# EAGLE board opaq_n3 (EAGLE 6.3)
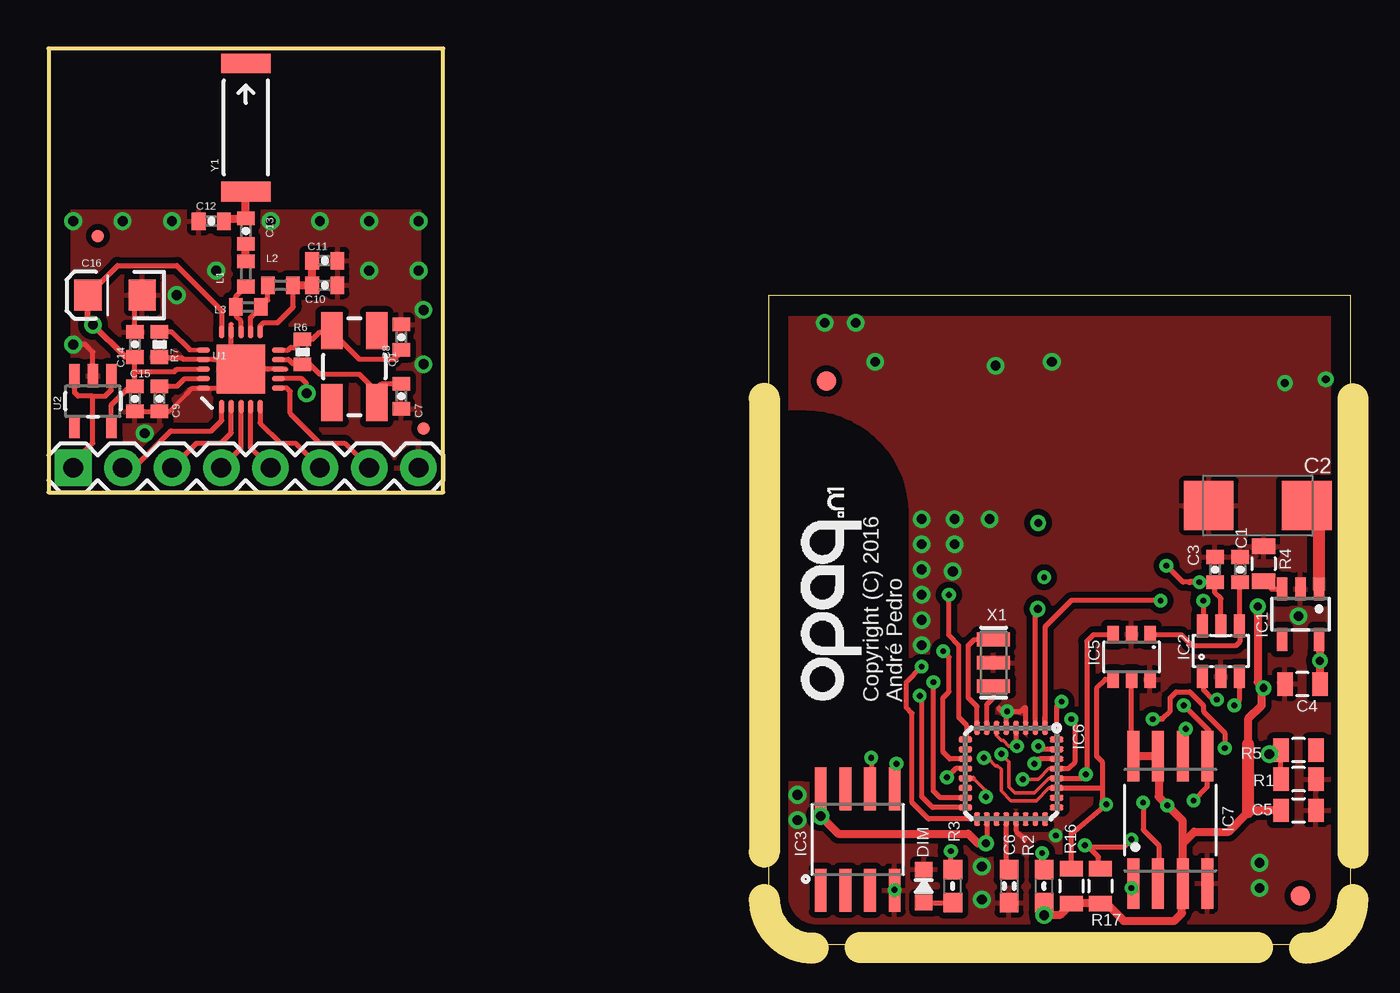
[diagram p0: board, top side]
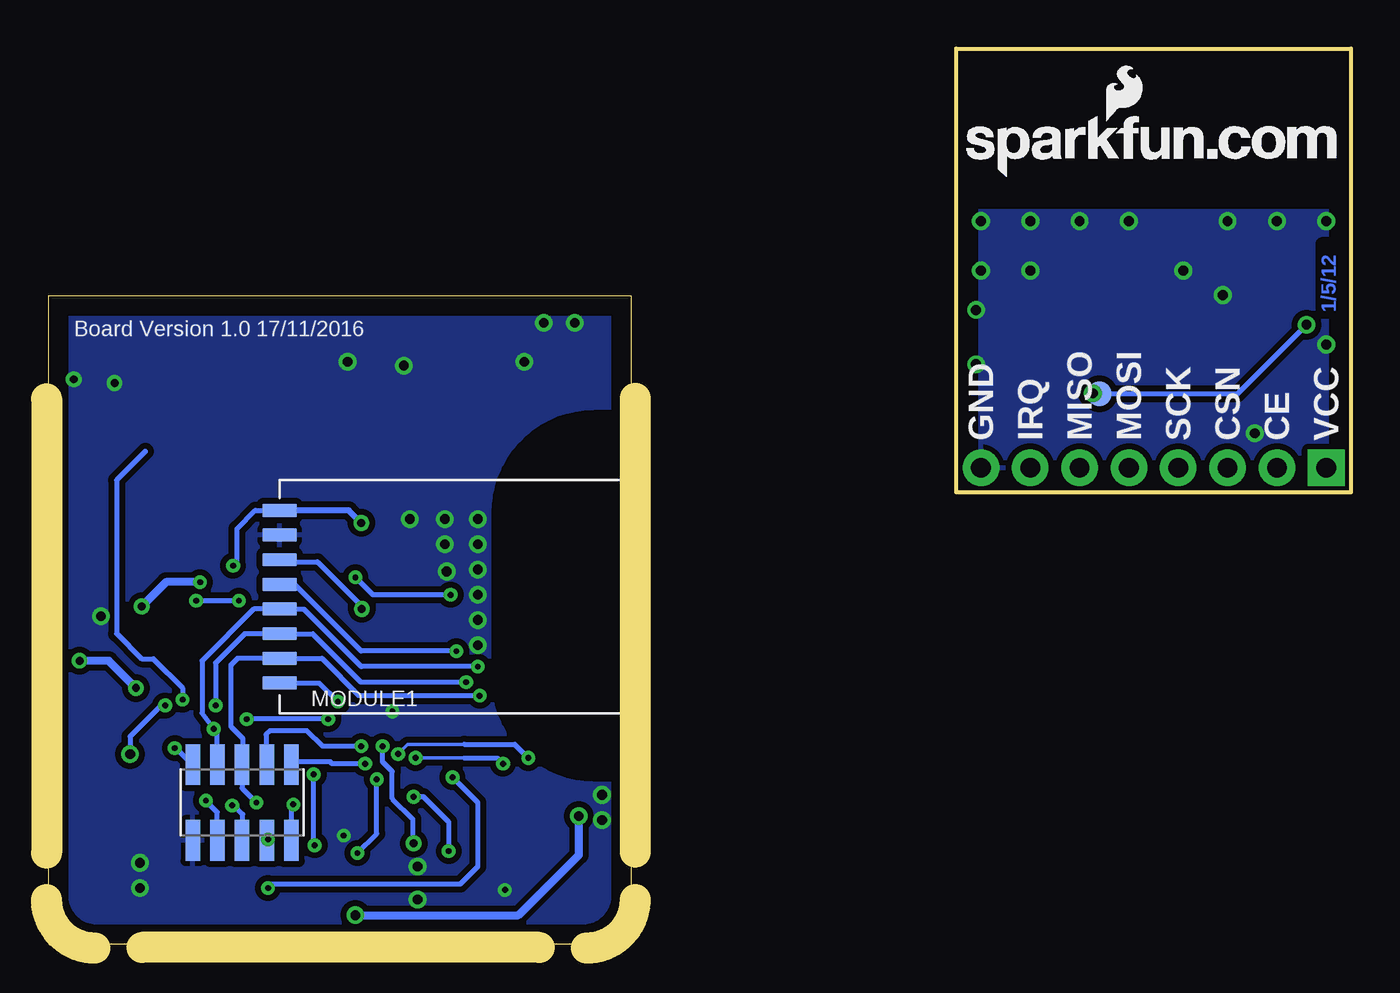
[diagram p1: board, bottom side, seen from below]

Size 67.06 x 46.13 mm. Coordinates in mm from the lower left corner, seen from the top.
Outline: 67.06,2.5 67.06,33.4 37.06,33.4 37.06,2.5 arc90 39.56,0 64.56,0 arc90 67.06,2.5
Outline: 0,23.27 20.32,23.27 20.32,46.13 0,46.13 0,23.27
Copper layers (1*16): Top 0.035mm / dielectric 1.5mm / Bottom 0.035mm
Design rules "default *": minimum track width 10mil, minimum drill 6mil, track to track 7mil, track to pad 7mil, pad to pad 7mil, via to via 7mil, smd to smd 7mil, copper to edge 40mil, drill to drill 8mil, minimum pad ring 10mil, minimum via ring 8mil, stop-mask expansion 4mil, vias tented up to drill 0.7mm, thermal gap 10mil
Net classes: 1 power: width 0.381 mm, clearance 0.254 mm; 2 gnd: width 0.305 mm, drill 0.406 mm, clearance 0.203 mm; 3 power usb: width 0.508 mm, drill 0.406 mm, clearance 0.203 mm
tRestrict: area 37.1,8.7 to 44,27.2
bRestrict: area 37.1,8.7 to 44,27.2
Milling: 8 lines

## Footprints (pad centres in the part's own frame; a part is rotated, then mirrored left to right if it is on the bottom)
0402-CAP = smd 0.7 x 0.9: 1 -0.65,0; 2 0.65,0
C/6032-28R = smd 2.55 x 2.5: + 2.525,0; - -2.525,0
0805 = smd 0.8 x 1.2: 1 -0.9,0; 2 0.9,0
0603-CAP = smd 1.016 x 0.965: 1 -0.85,0; 2 0.85,0
EIA3216 = smd 1.4 x 1.6: A 1.4,0; C -1.4,0
0603-LED = smd 0.8 x 0.9: MINUS -0.85,0; PLUS 0.85,0
SOT23-5 = smd 0.55 x 1.2: 1 -0.95,-1.3; 2 0,-1.3; 3 0.95,-1.3; 4 0.95,1.3; 5 -0.95,1.3
SOT23-6 = smd 0.55 x 1.2: 1 -0.95,-1.3; 2 0,-1.3; 3 0.95,-1.3; 4 0.95,1.3; 5 0,1.3; 6 -0.95,1.3
SOIC8 = smd 0.61 x 2.21: 1 -1.905,-2.616; 2 -0.635,-2.616; 3 0.635,-2.616; 4 1.905,-2.616; 5 1.905,2.616; 6 0.635,2.616; 7 -0.635,2.616; 8 -1.905,2.616
SOT23-6' = smd 0.6 x 0.9: 1 -0.95,-1.15; 2 0,-1.15; 3 0.95,-1.15; 4 0.95,1.15; 5 0,1.15; 6 -0.95,1.15
MLF32 = smd 0.7 x 0.3: 1 -2.35,1.75; 2 -2.35,1.25; 3 -2.35,0.75; 4 -2.35,0.25; 5 -2.35,-0.25; 6 -2.35,-0.75; 7 -2.35,-1.25; 8 -2.35,-1.75; 17 2.35,-1.75; 18 2.35,-1.25; 19 2.35,-0.75; 20 2.35,-0.25; 21 2.35,0.25; 22 2.35,0.75; 23 2.35,1.25; 24 2.35,1.75 | smd 0.3 x 0.7: 9 -1.75,-2.35; 10 -1.25,-2.35; 11 -0.75,-2.35; 12 -0.25,-2.35; 13 0.25,-2.35; 14 0.75,-2.35; 15 1.25,-2.35; 16 1.75,-2.35; 25 1.75,2.35; 26 1.25,2.35; 27 0.75,2.35; 28 0.25,2.35; 29 -0.25,2.35; 30 -0.75,2.35; 31 -1.25,2.35; 32 -1.75,2.35
SO08WIDE = smd 0.61 x 2.6: 1 -1.905,-3.269; 2 -0.635,-3.269; 3 0.635,-3.269; 4 1.905,-3.269; 5 1.905,3.286; 6 0.635,3.286; 7 -0.635,3.286; 8 -1.905,3.286
FIDUCIAL-1X2.5 = smd 1 x 1: 1 0,0
1X08 = drill 1.016 pad 1.88 square: 1 0,0 | drill 1.016 pad 1.88: 2 2.54,0; 3 5.08,0; 4 7.62,0; 5 10.16,0; 6 12.7,0; 7 15.24,0; 8 17.78,0
MICRO-FIDUCIAL = smd 0.635 x 0.635: 1 0,0
62101021021 = smd 0.75 x 2.1: 1 -1.905,-1.95; 2 -0.635,-1.95; 3 0.635,-1.95; 4 1.905,-1.95; 5 3.175,-1.95; 6 3.175,1.95; 7 1.905,1.95; 8 0.635,1.95; 9 -0.635,1.95; 10 -1.905,1.95
C0402 = smd 0.7 x 0.9: 1 -0.65,0; 2 0.65,0
SMD8-MODULE = smd 0.7 x 1.8: 1 -4.445,0; 2 -3.175,0; 3 -1.905,0; 4 -0.635,0; 5 0.635,0; 6 1.905,0; 7 3.175,0; 8 4.445,0
CRYSTAL-SMD-5X3 = smd 1.9 x 1.1: 1 -1.85,-1.15; 2 1.85,-1.15; 3 1.85,1.15; 4 -1.85,1.15
0603-RES = smd 1.016 x 0.965: 1 -0.85,0; 2 0.85,0
0402-RES = smd 0.7 x 0.9: 1 -0.65,0; 2 0.65,0
PAD.03X.05 = smd 1.27 x 1.27: P$1 0,0
QFN20_ALT1 = smd 2.515 x 2.515: 0 0,0 | smd 0.686 x 0.293: 1 -1.925,0.986; 2 -1.925,0.493; 3 -1.925,0; 4 -1.925,-0.493; 5 -1.925,-0.986; 11 1.925,-0.986; 12 1.925,-0.493; 13 1.925,0; 14 1.925,0.493; 15 1.925,0.986 | smd 0.293 x 0.686: 6 -0.986,-1.925; 7 -0.493,-1.925; 8 0,-1.925; 9 0.493,-1.925; 10 0.986,-1.925; 16 0.986,1.925; 17 0.493,1.925; 18 0,1.925; 19 -0.493,1.925; 20 -0.986,1.925
PAD-0.008 = smd 0.203 x 0.203: P$1 0,0
RESONATOR-SMD = smd 0.7 x 1.7: 1 -1.2,0; 2 0,0; 3 1.2,0
ANTENNA-CHIP5 = smd 1.016 x 2.54: FEED -3.302,0; NC 3.302,0

## Placement (x,y rotation side)
C1  100pf  [0402-CAP]  61.36,19.3 90 top
C2  [C/6032-28R]  62.26,22.6 0 top
C3  100pf  [0402-CAP]  60.06,19.3 90 top
C4  0.1uF  [0805]  64.56,13.4 180 top
C5  0.1uF  [0805]  64.36,6.9 0 top
C6  0.1  [0603-CAP]  49.46,3 270 top
C7  22pF  [0402-CAP]  18.16,28.22 270 top
C8  22pF  [0402-CAP]  18.16,31.27 90 top
C9  33nF  [0402-CAP]  5.72,28.1 270 top
C10  2.2nF  [0402-CAP]  14.22,33.94 0 top
C11  4.7pF  [0402-CAP]  14.22,35.21 0 top
C12  1.0pF  [0402-CAP]  8.38,37.24 0 top
C13  1.5pF  [0402-CAP]  10.16,36.73 90 top
C14  10nF  [0402-CAP]  4.45,30.89 270 top
C15  1nF  [0402-CAP]  4.45,28.1 90 top
C16  10uF  [EIA3216]  3.43,33.43 180 top
DIM  LED0603  [0603-LED]  45.06,3 270 top
FRAME1  FRAME-LETTER  [CREATIVE_COMMONS]  16.95,-13.72 0 top  (outside the outline)
FRAME2  FRAME-LETTERNO_PACKAGE  [DUMMY]  16.95,-13.72 0 top  (outside the outline)
IC1  RT9013-XXXB  [SOT23-5]  64.46,17 180 top
IC2  TS5A3157  [SOT23-6]  60.36,15.1 0 top
IC3  ATSHA204_SOIC8  [SOIC8]  41.66,5.4 0 top
IC5  ADS1100  [SOT23-6']  55.76,14.8 180 top
IC6  ATMega-328  [MLF32]  49.56,8.8 270 top
IC7  AT25F512BWIDE_5.3MM  [SO08WIDE]  57.76,6.4 0 top
JP1  FIDUCIAL1X2.5  [FIDUCIAL-1X2.5]  64.46,2.5 0 top
JP2  FIDUCIAL1X2.5  [FIDUCIAL-1X2.5]  40.06,29 0 top
JP3  [1X08]  1.27,24.54 0 top
JP4  FIDUCIALUFIDUCIAL  [MICRO-FIDUCIAL]  2.54,36.48 0 top
JP5  FIDUCIALUFIDUCIAL  [MICRO-FIDUCIAL]  19.3,26.57 0 top
K1  62101021021  [62101021021]  56.46,7.3 180 bottom
L1  3.9nH  [C0402]  10.16,34.52 90 top
L2  2.7nH  [C0402]  11.94,33.94 180 top
L3  8.2nH  [C0402]  10.29,32.82 180 top
MODULE1  NRF24L01-MOD-SMD  [SMD8-MODULE]  55.16,17.9 270 bottom
Q1  16MHz  [CRYSTAL-SMD-5X3]  15.75,29.75 90 top
R1  [0805]  64.36,8.5 180 top
R2  10k  [0603-RES]  51.26,3 90 top
R3  1k5  [0603-RES]  46.56,3 90 top
R4  [0805]  62.56,19.6 270 top
R5  [0805]  64.36,10 180 top
R6  1M  [0402-RES]  13.08,30.51 90 top
R7  22K  [0402-RES]  5.72,30.89 270 top
R16  100k  [0805]  52.66,3 270 top
R17  [0805]  54.16,3 270 top
TP1  [PAD.03X.05]  12.95,28.35 0 bottom
U1  NRF24L01ALT1  [QFN20_ALT1]  9.91,29.62 90 top
U2  3.3V  [SOT23-5]  2.29,27.97 180 top
U$1  PAD  [PAD-0.008]  9.4,31.93 0 top
U$4  PAD  [PAD-0.008]  12.22,29.62 0 top
U$5  LOGO-SFENEW  [SFE-NEW-WEBLOGO]  19.81,39.53 0 bottom
X1  16 MHz  [RESONATOR-SMD]  48.66,14.5 90 top
Y1  ANTENNA2SMD5  [ANTENNA-CHIP5]  10.16,42.07 90 top

## Library data of the parts
C1 C3-C5 R16 = SparkFun-Passives
C2 = rcl
C6 DIM IC6 IC7 R2 R3 = LowPowerLab
C7-C16 JP1-JP5 L1-L3 Q1 R6 R7 TP1 U2 U$5 X1 Y1 = SparkFun
FRAME1 = SparkFun-Aesthetics
FRAME2 = SparkFun-Aesthetics; DESIGNER: Nobody; VERSION: v01
IC1 = v-reg_extra
IC2 = pimoroni
IC3 = SparkFun-DigitalIC; PROD_ID: IC-11981
IC5 = bytewerk-analog; MF: TI; MPN: ADS1100; OC_MOUSER: 595-ADS1100A1IDBVT
K1 = Wurth_Elektronik_Electromechanic_Board_to_Board_Connectors_rev15c
MODULE1 = nrf24l01
R1 R4 R5 R17 = resistor
U1 U$1 U$4 = Testing

## Nets
3.3V: C3.1 C4.1 C5.1 IC1.5 IC2.5 IC3.8 IC5.5 IC6.4 IC6.6 IC6.18 IC7.3 IC7.7 IC7.8 K1.8 MODULE1.1 R2.1 R16.2 R17.2
A0: IC6.23
A1: IC6.24
A2: IC6.25
A3: IC6.26
A4_SDA: IC3.5 IC5.4 IC6.27 K1.10 R16.1
A5_SCL: IC3.6 IC5.3 IC6.28 K1.9 R17.1
A6: IC6.19
A7: IC6.22
ADC_IN: C1.1 IC2.4 IC5.1
ANT: C12.2 C13.2 Y1.FEED
AREF: C6.1 IC6.20
CE: JP3.2 U1.1
CSN: JP3.3 U1.2
CTRL_ADC: IC2.6 IC6.1
CURRENT_VOUT: IC2.1
D0_RX: IC6.30 K1.1
D1_TX: IC6.31 K1.2
D8: IC6.12 IC7.1
D11_MOSI: IC6.15 IC7.5 K1.7 MODULE1.6
D12_MISO: IC6.16 IC7.2 K1.3 MODULE1.7
D13_SCK: IC6.17 IC7.6 K1.4 MODULE1.5
DIM2: IC6.10
DIM3: IC6.13 R3.2
DIM4: IC6.14
GND: C1.2 C2.- C3.2 C4.2 C5.2 C6.2 DIM.MINUS IC1.2 IC2.2 IC3.4 IC5.2 IC5.6 IC6.3 IC6.5 IC6.21 IC7.4 K1.6 MODULE1.2 R1.1 R4.1 X1.2
GND1: C7.2 C8.2 C9.2 C10.2 C11.2 C12.1 C14.1 C15.1 C16.C JP3.8 R7.2 U1.0 U1.8 U1.14 U1.17 U1.20 U2.2 U$1.P$1 U$4.P$1
IQR: JP3.7 U1.6
MISO: JP3.6 U1.5
MOSI: JP3.5 U1.4
N$1: IC6.7 X1.1
N$2: DIM.PLUS R3.1
N$3: C7.1 Q1.1 R6.1 U1.9
N$4: C8.1 Q1.3 R6.2 U1.10
N$5: R7.1 U1.16
N$6: L1.1 L3.2 U1.13
N$7: C10.1 C11.1 L2.1 U1.11
N$8: C9.1 U1.19
N$9: L2.2 L3.1 U1.12
N$10: IC1.3 R4.2
N$11: C13.1 L1.2
N$21: IC6.8 X1.3
NRF24_CE: IC6.2 MODULE1.3
NRF24_CSN: IC6.11 MODULE1.4
NRF24_IRQ: IC6.32 MODULE1.8
RAW: JP3.1 U2.1 U2.3
RELAY_SET: IC6.9
RST: IC6.29 K1.5 R2.2
SCK: JP3.4 U1.3
V_MEASURE: IC2.3 R1.2 R5.2
VCC: C2.+ IC1.1
VCC1: C14.2 C15.2 C16.A TP1.P$1 U1.7 U1.15 U1.18 U2.5
VPLUS_IN [power]: R5.1

## Tracks (layer width: path | path; a pad name or v marks a point on that pad's centre or on a via)
3.3V  (via drill 0.3, 0.4, 0.5)
  Top 0.178: v49.86,10.2 49.46,10.2 49.16,10.5 49.06,10.5 48.81,10.75 IC6.6
  Top 0.254: IC6.18 48.31,5.25 v48.26,5.2 | IC6.4 49.81,10.35 v49.86,10.2 | 55.86,13.75 IC5.5 55.76,9.78 IC7.8 | IC3.8 v39.76,6.61 | R17.2 54.46,2.1 | 58.36,3.1 IC7.3 | v51.26,1.5 R2.1 | IC2.5 60.36,17.8 60.06,18.1 C3.1 v59.26,18.65 | 58.76,18.65 58.41,18.65 v57.56,19.5
  Top 0.305: v59.26,18.65 58.76,18.65
  Top 0.406: 61.76,10.3 61.76,11.6 62.46,12.3 62.46,13.1 v62.56,13.2 62.26,13.5 v62.26,17.4 | v39.76,6.61 40.66,5.7 47.36,5.7 47.86,5.2 v48.26,5.2 | IC7.8 IC7.7 57.16,9.65 57.16,7.6 v57.61,7.15 58.4,6.37 58.4,5.2 | R17.2 R16.2 52.06,1.5 v51.26,1.5 | 54.46,2.1 55.36,1.2 57.96,1.2 58.36,1.6 58.36,3.1 | IC7.3 58.4,5.2 | 58.4,5.2 59,5.8 60.76,5.8 61.76,6.8 61.76,6.9 C5.1 | IC1.5 65.46,15.65 v65.46,14.6 C4.1
  Top 0.61: 61.76,10.3 61.76,6.8
  Bottom 0.254: v49.86,10.2 49.86,9.4 49.36,8.9 49.36,7.5 IC6.18 48.31,5.25 v48.26,5.2 | v57.56,19.5 57.36,19.7 57.36,21.4 56.42,22.34 MODULE1.1 | K1.8 57.06,5.38 57.06,6.7 57.51,7.15 v57.61,7.15
  Bottom 0.305: v50.96,21.7 51.61,22.34 MODULE1.1
  Bottom 0.406: v51.26,1.5 42.86,1.5 39.76,4.61 v39.76,6.61 | v62.56,13.2 63.96,14.6 v65.46,14.6 | v59.26,18.65 61.01,18.65 v62.26,17.4
A4_SDA  (via drill 0.3)
  Top 0.178: IC6.27 51.51,8.05 50.86,7.4 49.56,7.4 49.06,7.9 49.06,9 48.86,9.2 48.76,9.2 48.36,9.6 v48.16,9.6
  Top 0.254: IC5.4 54.41,13.65 53.96,13.2 53.96,9.7 54.26,9.4 54.26,8 | IC6.27 54.21,8.05 54.26,8 | v43.66,9.3 43.66,8.11 IC3.5 | R16.1 52.66,5.7 v54.46,7.2 54.26,7.4 54.26,8
  Bottom 0.178: 45.66,9.6 v48.16,9.6
  Bottom 0.254: 45.66,9.6 43.96,9.6 v43.66,9.3 | K1.10 54.56,7.11 v54.46,7.2
A5_SCL  (via drill 0.3)
  Top 0.178: IC6.28 51.51,8.55 50.76,7.8 49.76,7.8 49.46,8.1 49.46,9.4 v49.06,9.8
  Top 0.254: IC5.3 53.81,15.95 53.46,15.6 53.46,8.8 v53.41,8.75 53.21,8.55 IC6.28 | v42.36,9.6 42.36,8.08 IC3.6 | R17.1 54.06,4 54.06,4.5 53.46,5.1 v53.36,5.1 53.46,5 55.36,5 v55.76,5.4
  Bottom 0.178: 45.66,10.3 48.56,10.3 v49.06,9.8
  Bottom 0.254: 45.66,10.3 43.06,10.3 v42.36,9.6 | v53.36,5.1 53.41,5.15 v53.41,8.75 | K1.9 v55.76,5.4
ADC_IN
  Top 0.254: IC5.1 58.31,15.95 58.86,15.4 61.16,15.4 61.36,15.6 61.36,16.35 IC2.4 61.31,18.6 C1.1
ANT
  Top 0.203: C12.2 9.14,37.24 9.28,37.38
  Top 0.406: 9.28,37.38 C13.2 10.16,37.49 Y1.FEED
AREF
  Top 0.254: C6.1 49.31,4 IC6.20
CE
  Top 0.254: U1.1 8.92,26.98 8.38,26.45 6.3,26.45 4.42,24.57 3.84,24.57 JP3.2
CSN
  Top 0.254: JP3.3 7.62,25.81 8.89,25.81 9.41,26.33 U1.2
CTRL_ADC  (via drill 0.3)
  Top 0.254: v59.46,17.7 59.46,16.45 IC2.6 | 51.31,11.75 IC6.1 51.31,16.35 52.66,17.7 v57.26,17.7
  Bottom 0.254: v59.46,17.7 v57.26,17.7
CURRENT_VOUT  (via drill 0.3)
  Top 0.254: IC2.1 59.46,13.75 59.46,13.1 59.96,12.6 v60.16,12.6
  Bottom 0.254: 62.06,25.4 63.56,23.9 63.56,16 62.26,14.7 61.66,14.7 60.16,13.2 v60.16,12.6
D0_RX  (via drill 0.3)
  Top 0.254: IC6.30 51.01,9.55 v50.76,9.3
  Bottom 0.254: v50.76,9.3 52.46,9.3 52.56,9.4 54.41,9.4 K1.1
D1_TX  (via drill 0.3)
  Top 0.254: IC6.31 51.11,10.05 v50.96,10.2
  Bottom 0.254: v50.96,10.2 52.96,10.2 53.76,11 55.66,11 55.86,10.8 55.86,9.29 K1.2
D8  (via drill 0.3)
  Top 0.254: IC6.12 46.71,9.05 v46.26,8.6 | v55.76,2.9 55.82,3.1 IC7.1
  Bottom 0.254: v46.26,8.6 44.96,7.3 44.96,4 45.86,3.1 55.56,3.1 v55.76,2.9
D11_MOSI  (via drill 0.3)
  Top 0.254: IC6.15 45.91,7.55 45.56,7.9 v45.56,13.5 | v58.96,7.4 59.66,8.1 IC7.5 | 59.56,9.79 IC7.5 | v58.46,12.3 59.76,11 59.76,9.78 IC7.5
  Bottom 0.254: v45.56,13.5 50.96,13.5 53.45,15.99 MODULE1.6 56.97,15.99 58.46,14.5 v58.46,12.3 | K1.7 58.37,6.8 v58.96,7.4
D12_MISO  (via drill 0.3)
  Top 0.254: IC6.16 45.51,7.05 44.96,7.6 44.96,12.7 v44.86,12.8 | v56.36,7.3 56.36,5.9 57.16,5.1 57.16,3.17 IC7.2
  Bottom 0.254: v44.86,12.8 51.06,12.8 52.98,14.72 MODULE1.7 57.34,14.72 57.66,14.4 57.66,11.2 57.06,10.6 57.06,9.29 K1.3 57.09,8.04 v56.36,7.3
D13_SCK  (via drill 0.3)
  Top 0.254: IC6.17 45.31,6.45 44.46,7.3 44.46,11.9 44.16,12.2 44.16,13.5 v44.96,14.3 | IC7.6 58.56,9.85 v58.56,11.1
  Bottom 0.254: v44.96,14.3 50.96,14.3 53.92,17.27 MODULE1.5 56.5,17.27 59.16,14.6 59.16,11.9 v58.56,11.1 58.37,11.11 K1.4
DIM3  (via drill 0.3)
  Top 0.178: 47.61,8.55 48.26,7.9
  Top 0.254: R3.2 46.56,4.1 46.46,4.2 v46.46,4.8 | IC6.13 47.61,8.55 | 48.26,7.9 v48.26,7.6
  Bottom 0.254: v48.26,7.6 47.76,7.6 46.46,6.3 v46.46,4.8
GND  (via drill 0.3, 0.4, 0.5)
  Top 0.254: IC6.21 49.81,5.85 50.26,5.4 | IC6.5 49.31,11.78 48.94,12.15 | IC6.3 50.31,12.15 50.26,12.2 50.06,12 v49.36,12
  other vias: 43.56,2.8 44.96,16.7 64.36,16.9 46.56,19.2 46.66,20.6 46.66,21.9 48.46,21.9 62.36,2.9 62.36,4.2 48.06,2.3 38.56,6.4 48.06,4 38.56,7.7 51.86,5.6 44.96,18 44.96,19.3 44.96,20.6 44.96,21.9 44.96,15.4 63.66,28.9 65.76,29.1 41.56,32 48.76,29.8 39.96,32 42.56,30 51.66,30
  pour Top (isolate 0.305): 37.06,32.8 67.06,32.8 67.06,0 37.06,0
  pour Bottom (isolate 0.305): 37.06,32.8 67.06,32.8 67.06,0 37.06,0
GND1  (via drill 0.51)
  Top 0.203: 5.7,27.45 6.21,27.45 7.11,28.35
  Top 0.254: C16.C 4.45,33.18 C14.1 | C9.2 5.7,27.45 C15.1 | v1.27,30.89 1.91,30.89 2.29,30.51 U2.2 | 9.41,30.11 U1.17 6.95,30.11 6.88,30.18 5.78,30.18 R7.2 | 9.41,30.11 U1.14 9.41,31.92 U$1.P$1 | 9.41,30.11 U1.0 8.92,28.63 U1.20 7.4,28.63 7.11,28.35 | 10.16,29.62 U$4.P$1 U1.8
  other vias: 4.95,26.32 1.27,37.24 3.81,37.24 6.35,37.24 6.6,33.43 8.64,34.7 11.43,37.24 13.97,37.24 16.51,37.24 19.05,37.24 16.51,34.7 19.05,34.7 19.3,32.67 19.3,29.87
  pour Bottom (isolate 0.305): 0,23.27 0,37.75 20.32,37.75 20.32,23.27
  pour Top (isolate 0.305): 0,23.27 0,37.75 20.32,37.75 20.32,23.27
IQR
  Top 0.254: JP3.7 15.24,25.81 13.97,25.81 12.45,27.33 12.45,28.48 12.29,28.63 U1.6
MISO
  Top 0.254: JP3.6 12.7,25.81 11.94,25.81 10.89,26.86 U1.5
MOSI
  Top 0.254: U1.4 10.4,25.57 JP3.5
N$1
  Top 0.254: IC6.7 48.31,12.35 48.66,12.7 X1.1
N$2
  Top 0.254: DIM.PLUS R3.1
N$3
  Top 0.254: R6.1 13.08,29.87 | R6.1 13.48,29.86 13.97,29.37 16,29.37 16.83,28.54 | 16.83,28.54 16.89,28.48 16.89,28.22 | 16.89,28.22 16.89,27.97 16.9,27.96 Q1.1 | 16.89,28.22 17.02,28.22 17.29,28.49 | 16.83,28.54 16.76,28.48 | C7.1 17.16,28.87 16.83,28.54 | U1.9 12.36,30.11 12.57,29.9 13.04,29.9 R6.1
N$4
  Top 0.254: 14.6,31.64 14.61,31.65 14.61,32.03 | 14.6,31.64 Q1.3 14.6,31.53 16,30.13 17.78,30.13 18.16,30.51 C8.1 | 14.6,31.64 14.48,31.52 13.97,31.52 13.6,31.16 R6.2 12.66,30.74 12.47,30.74 12.34,30.61 U1.10
N$5
  Top 0.254: U1.16 7.25,30.62 6.34,31.54 R7.1
N$6
  Top 0.254: U1.13 9.91,32.08 9.68,32.31 9.68,32.78 L3.2 9.64,33.35 L1.1
N$7
  Top 0.203: 13.57,33.92 | C10.1 13.57,33.92 | 13.57,33.92
  Top 0.254: L2.1 12.6,33.93 12.6,32.82 11.79,32.01 11.07,32.01 10.89,31.82 U1.11
  Top 0.406: 13.57,33.92 C11.1 | 13.59,33.94 | 13.59,33.94 C10.1 | L2.1 13.59,33.94
N$8
  Top 0.254: C9.1 6.62,28.75 7,29.13 U1.19
N$9
  Top 0.254: U1.12 10.4,32.28 L3.1 11.29,33.17 L2.2
N$10
  Top 0.254: R4.2 62.96,18.3 IC1.3
N$11
  Top 0.203: C13.1 10.16,35.97
  Top 0.406: L1.2 10.16,35.97
N$21
  Top 0.254: IC6.8 47.81,12.25 47.36,12.7 47.36,15.4 47.66,15.7 X1.3
NRF24_CE  (via drill 0.4)
  Top 0.254: 50.94,17.23 v50.94,17.27 50.81,17.15 IC6.2
  Bottom 0.254: MODULE1.3 55.46,19.7 53.21,19.7 50.94,17.43 v50.94,17.27
NRF24_CSN  (via drill 0.3)
  Top 0.254: IC6.11 46.41,9.55 46.06,9.9 46.06,12.7 46.36,13 46.36,14.8 v46.06,15.1
  Bottom 0.254: MODULE1.4 54.4,18.54 50.96,15.1 v46.06,15.1
NRF24_IRQ  (via drill 0.3)
  Top 0.254: IC6.32 51.91,12.25 v52.16,12.5
  Bottom 0.254: MODULE1.8 53.12,13.46 v52.16,12.5
RAW
  Top 0.254: U2.1 3.24,28.54 2.92,28.22 2.29,28.22 | 2.29,28.22 1.52,28.22 1.34,28.41 U2.3 | JP3.1 1.27,24.79 2.29,25.81 2.29,28.22
RELAY_SET  (via drill 0.3)
  Top 0.254: 47.26,10.67 arc-45 IC6.9 47.26,10.6 47.26,11.3 46.86,11.7 46.86,15.4 46.36,15.9 v46.36,18 | v51.26,18.9 51.36,18.9
  Bottom 0.254: v46.36,18 50.36,18 v51.26,18.9
RST  (via drill 0.3)
  Top 0.178: IC6.29 51.51,9.05 50.96,8.5 v50.16,8.5
  Top 0.254: R2.2 51.16,3.95 v51.16,4.7 | IC6.29 52.51,9.05 52.86,9.4 52.86,11.4 v52.66,11.6 | 57.26,11.6 v56.86,11.6 57.36,11.6 57.76,12 57.76,12.7 58.06,13 58.76,13 59.46,12.3 59.46,12 60.56,10.9 v60.56,10.1
  Bottom 0.254: 50.21,8.55 v50.16,8.5 50.16,5.7 v51.16,4.7 | v52.66,11.6 v56.86,11.6 | v60.56,10.1 60.48,10.1 K1.5
SCK
  Top 0.254: U1.3 9.91,25.55 JP3.4
V_MEASURE  (via drill 0.3, 0.5)
  Top 0.254: v62.86,9.8 63.26,9.8 63.36,9.9 63.46,9.9 R5.2 R1.2 | IC2.3 61.31,12.55 v61.06,12.3
  Bottom 0.254: v62.86,9.8 62.86,10.7 61.26,12.3 v61.06,12.3
VCC
  Top 0.406: C2.+ 65.41,21.98
  Top 0.61: 65.41,21.98 IC1.1
VCC1  (via drill 0.51)
  Top 0.254: U2.5 3.24,27.78 4.21,28.75 C15.2 4.45,29.49 | U1.18 6.61,29.62 6.48,29.49 4.45,29.49 | 4.45,29.49 4.45,30.25 | C16.A 3.56,34.95 6.6,34.95 8.92,32.64 U1.15 | U1.7 13.04,29.13 13.28,28.88 v13.28,28.38
  Top 0.305: C16.A 2.03,32.16 v2.29,31.91 3.94,30.25 4.45,30.25 C14.2
  Bottom 0.254: v13.28,28.38 13.08,28.35 TP1.P$1 5.84,28.35 v2.29,31.91

## Text on the board
Bottom: 1/5/12
tPlace: Copyright (C) 2016 / André Pedro
bPlace: VCC | CE | CSN | SCK | MOSI | MISO | IRQ | GND
bNames: Board Version 1.0 17/11/2016
tDocu: André Pedro